# Altium PCB MAIN.PcbDoc
Units mil, origin at the board's own origin, x right, y up, seen from the top; angles counter-clockwise.
Board outline 3254.03 x 2166.03 mil, 2 copper layers (Top Layer, Bottom Layer); 65 components, 48 nets, 232 pads, 40 vias.
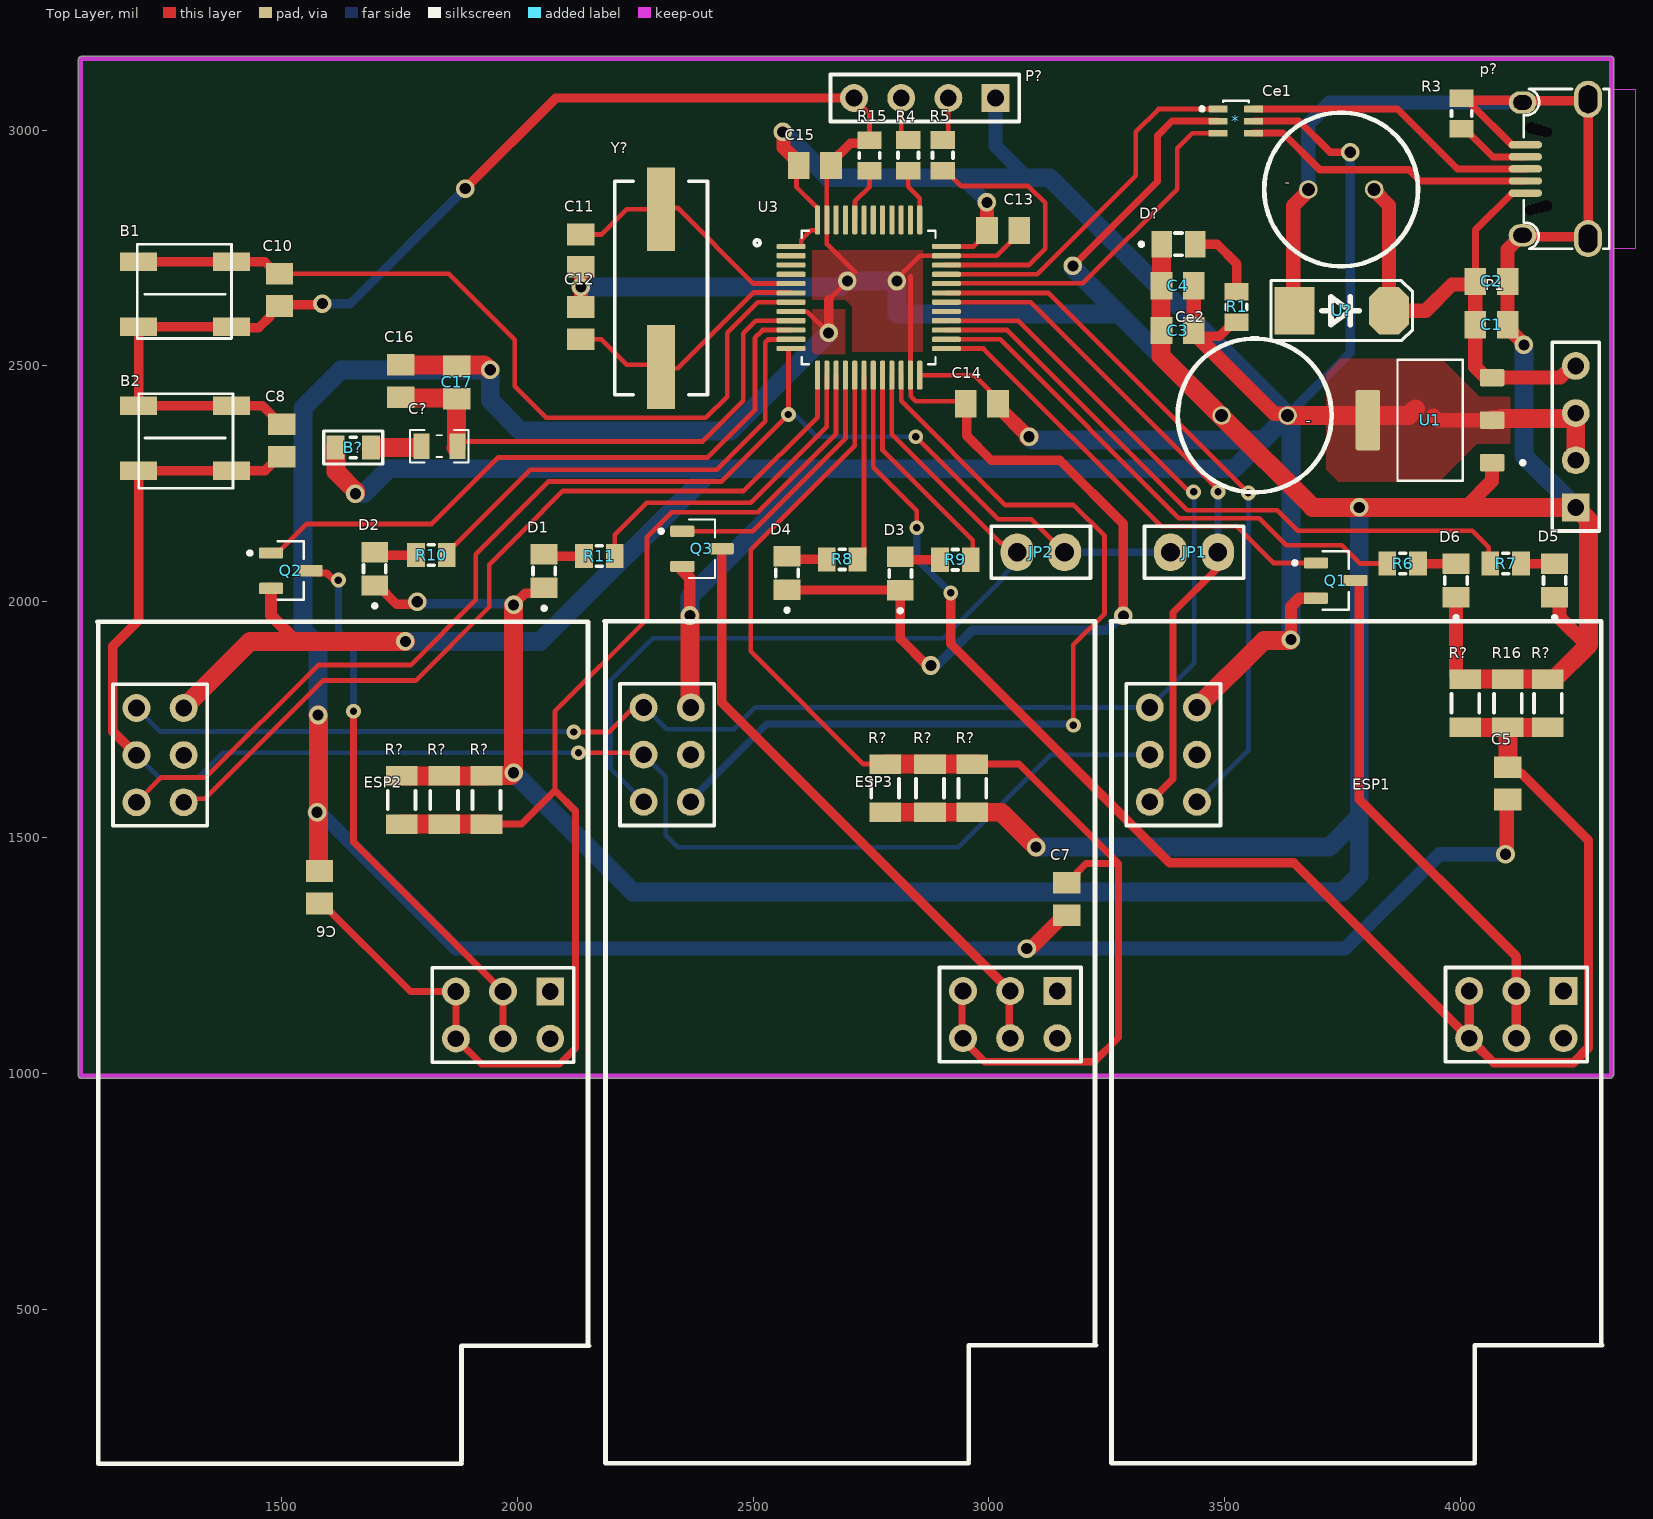
[diagram p0: Top Layer view]
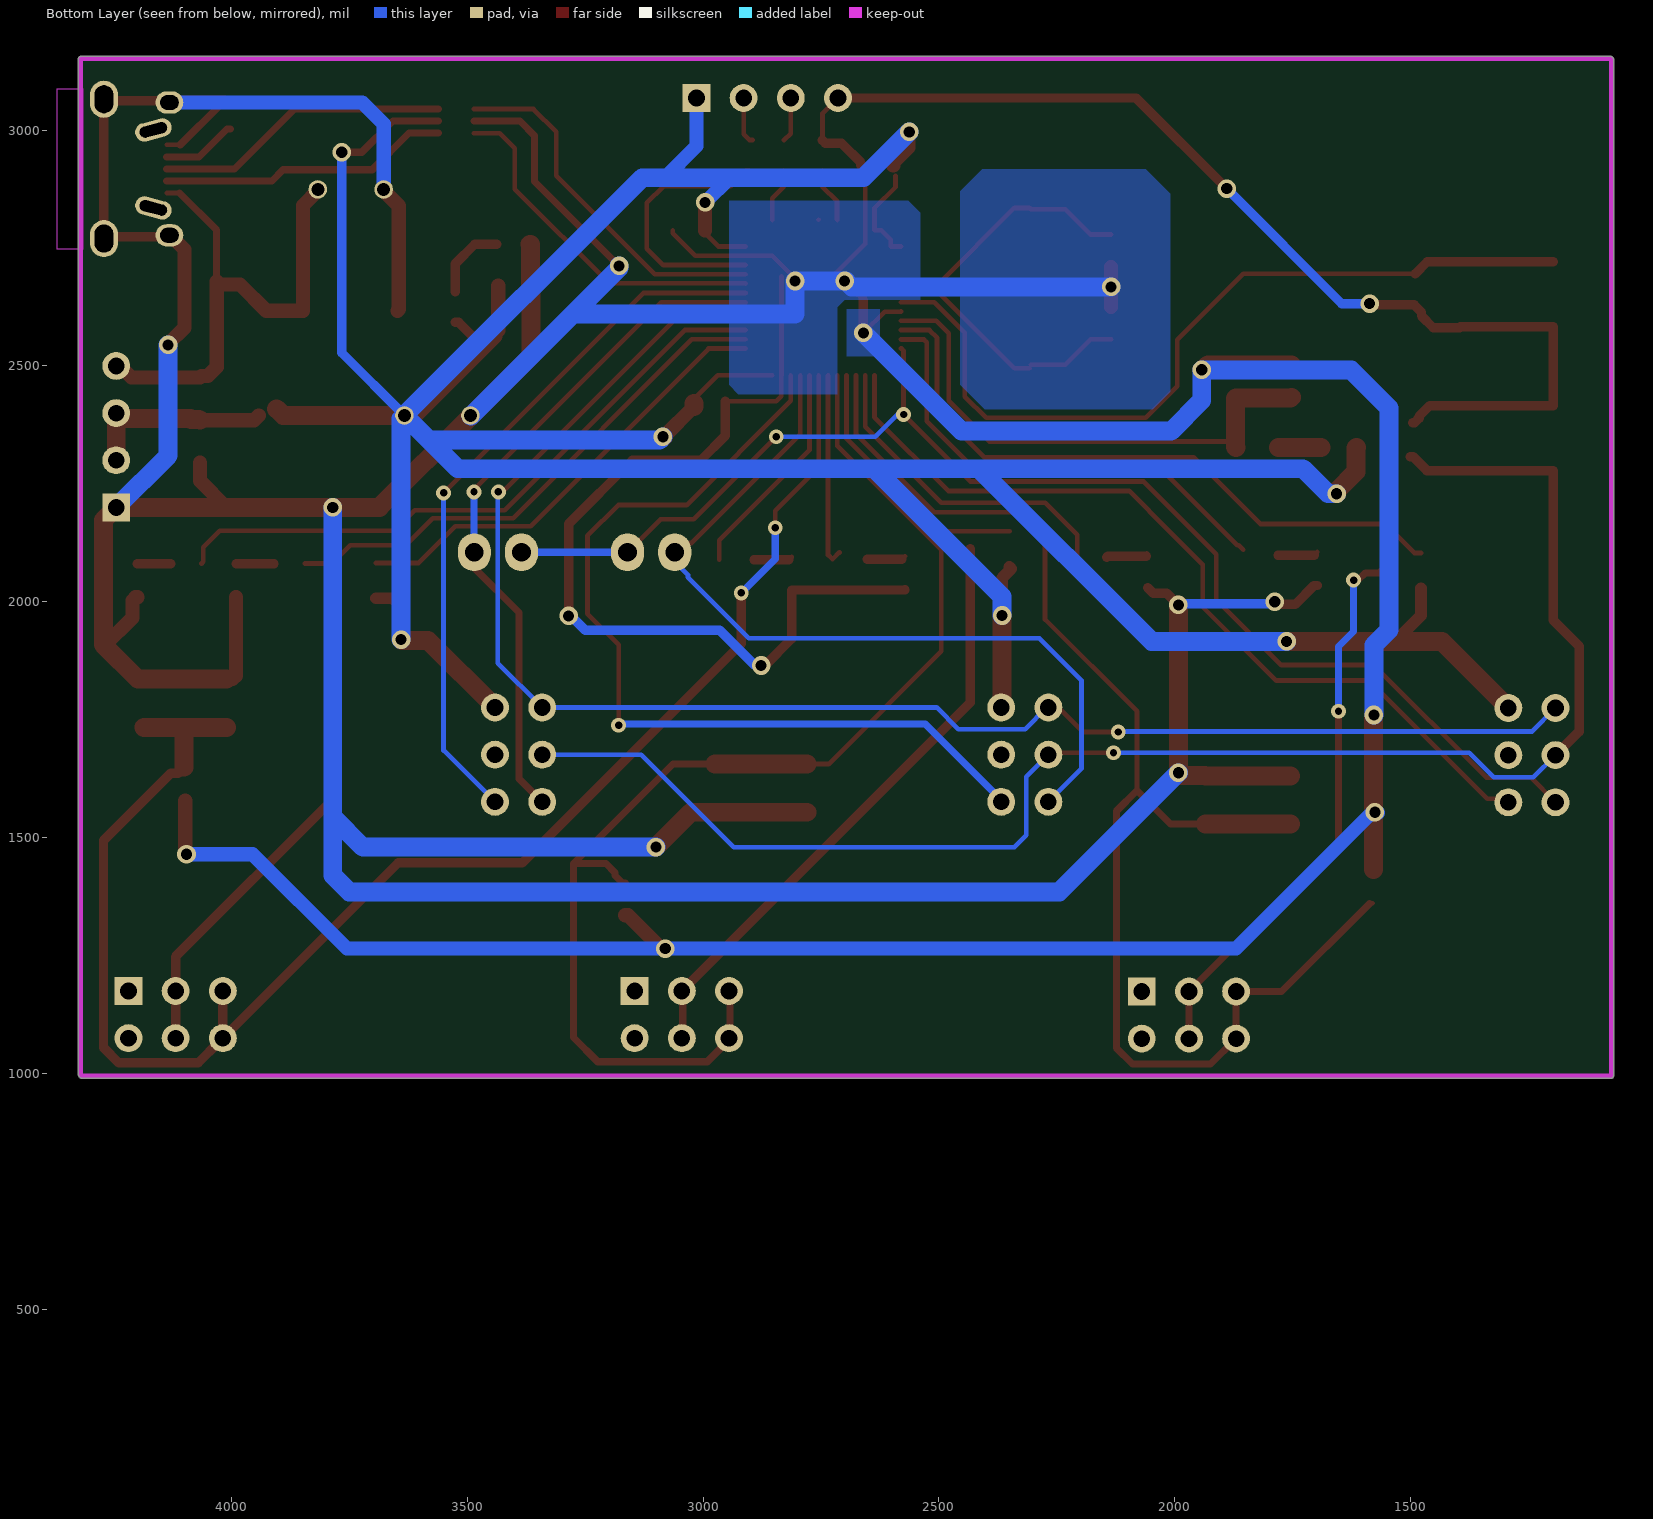
[diagram p1: Bottom Layer view, seen from below]
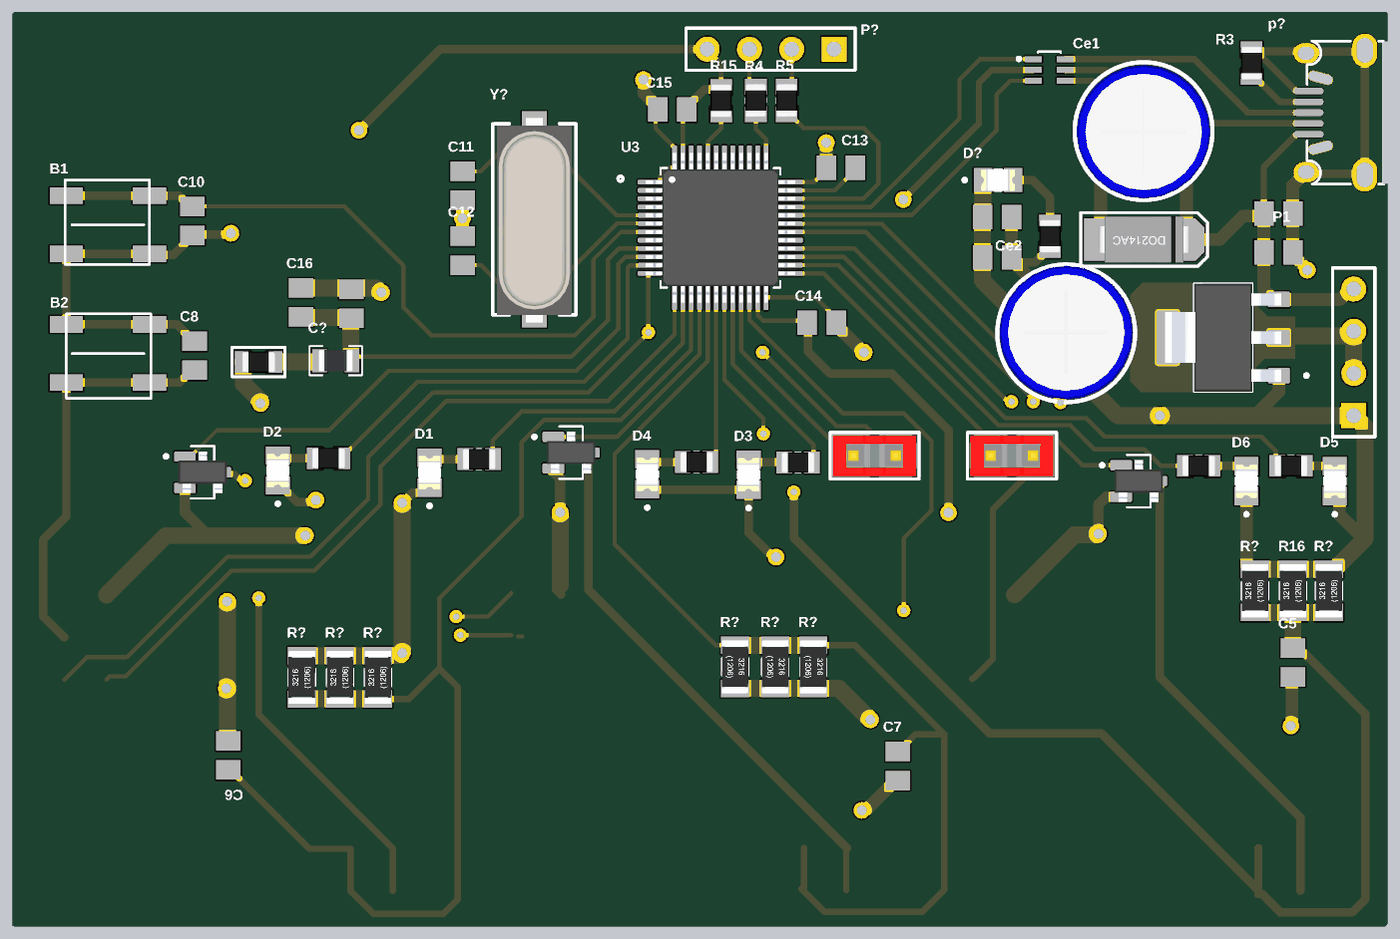
[diagram p2: 3D render of the assembled board from above, using the file's embedded part models]

## Layer stack, top to bottom
Top Solder: solder mask 0.4, Solder Resist, Dk 3.5
Top Layer: signal copper 1.4
Dielectric 1: dielectric 12.6, FR-4, Dk 4.8
Bottom Layer: signal copper 1.4
Bottom Solder: solder mask 0.4, Solder Resist, Dk 3.5

## Board outline
1069.98,995 1069.98,3150 cw(c1075,3150) 1071.47,3153.56 1071.45,3153.55 1072.45,3154.55 1072.44,3154.53 cw(c1076,3151) 1076,3156.01 4319,3156.01 cw(c4319,3151) 4324.02,3151 4324.02,997 cw(c4319,997) 4322.53,993.44 4322.55,993.45 4320.55,991.45 4320.56,991.47 cw(c4317,995) 4317,989.99 1075,989.99 cw(c1075,995)

## Design rules (kind name [scope] priority, off if disabled: settings)
Clearance [All] p1: gap=10 ignorepadtopadclearanceinfootprint=FALSE except(0: Arc-Hole Track-Hole SMDPad-Hole THPad-Hole Via-Hole Fill-Hole Poly-Hole Region-Hole Text-Hole; 7: Arc-Arc Arc-Track Arc-SMDPad Track-Track Track-SMDPad SMDPad-SMDPad)
ComponentClearance [All] p1: gap=10 collisioncheckmode=3 verticalgap=0 showdistances=FALSE
PolygonConnect [All] p1: connectstyle=Direct reliefconductorwidth=10 reliefentries=4 polygonreliefangle="90 Angle" airgapwidth=10
RoutingVias [All] p1: holewidth=28 width=50 viastyle="Through Hole" minholewidth=28 minwidth=50 maxholewidth=28 maxwidth=50
SolderMaskExpansion [All] p1: expansion=4 istentingtop=FALSE
Width [All] p1: maxlimit=40 minlimit=10 preferedwidth=30 minimp=50.000000 maximp=50.000000 favimp=50.000000
29 further rules are at their usual default settings.

## Classes and differential pairs
component class SHEET_MAIN: * B1 B2 B? C1 C2 C3 C4 C5 C6 C7 C8 C10 C11 C12 C13 C14 C15 C16 C17 C? Ce1 Ce2 D1 D2 D3 D4 D5 D6 D? ESP1 ESP2 ESP3 JP1 JP2 P1 P? Q1 Q2 Q3 R1 R3 R4 R5 R6 R8 R9 R10 R11 R15 R16 R? U1 U3 U? Y?

## Components (designator, comment, footprint, x,y, rotation, side; value= is the part's Value field where it differs from the comment)
* "Component_1" PCBComponent_1#1 3433.6,3004 r0 top
B1 "P BUTTON" SMD_PUSH_4PIN 1296,2652 r180 top
B2 "P BUTTON" SMD_PUSH_4PIN 1296,2347 r0 top
B? "BEAD" "RES 0805 (2012X06L)" 1685,2327 r180 top
C1 "100n" CAPC2012X145N 4065.29,2587 r180 top
C2 "10u" CAPC2012X145N 4065.29,2679 r180 top
C3 "10u" CAPC2012X145N 3400,2575 r0 top
C4 "100n" CAPC2012X145N 3400,2670 r0 top
C5 "100n" CAPC2012X145N 4100,1615 r270 top
C6 "100n" CAPC2012X145N 1581,1395 r90 top
C7 "100n" CAPC2012X145N 3165,1370 r270 top
C8 "100n" CAPC2012X145N 1501,2342 r90 top
C10 "100n" CAPC2012X145N 1496,2661.29 r90 top
C11 "22pf" CAPC2012X145N 2135,2744.29 r270 top
C12 "22pf" CAPC2012X145N 2135,2590.71 r90 top
C13 "100n" CAPC2012X145N 3030,2787 r0 top
C14 "100n" CAPC2012X145N 2985,2420 r180 top
C15 "100n" CAPC2012X145N 2631,2925 r0 top
C16 "10n" CAPC2012X145N 1753,2468 r270 top
C17 "100n" CAPC2012X145N 1872,2465 r270 top
C? "1u" IND0805 1835,2330 r180 top
Ce1 "100UF" "MY_CAP_POL 8MM" 3746.86,2874.04 r180 top value=3300u
Ce2 "100UF" "MY_CAP_POL 8MM" 3563.14,2394.96 r0 top value=3300u
D1 "SML-LXT0805IW-TR" LEDC2012X120N 2057,2065 r90 top
D2 "SML-LXT0805IW-TR" LEDC2012X120N 1698,2070 r90 top
D3 "SML-LXT0805IW-TR" LEDC2012X120N 2812,2060 r90 top
D4 "SML-LXT0805IW-TR" LEDC2012X120N 2572,2061 r90 top
D5 "SML-LXT0805IW-TR" LEDC2012X120N 4199,2045 r90 top
D6 "SML-LXT0805IW-TR" LEDC2012X120N 3990,2045 r90 top
D? "SML-LXT0805IW-TR" LEDC2012X120N 3402,2758 r0 top
ESP1 "" PCBComponent_1#2 3630,-2141 r90 top
ESP2 "" PCBComponent_1#2 1482,-2142 r90 top
ESP3 "" PCBComponent_1#2 2557,-2141 r90 top
JP1 "Jumper 2Pin" "Jumper Small - 2.54 - Black" 3435,2105 r0 top
JP2 "Jumper 2Pin" "Jumper Small - 2.54 - Black" 3110,2105 r180 top
P1 "Header 4" HDR1X4 4244,2200 r90 top
P? "Header 4" HDR1X4 3014,3068 r180 top
p? "USB Connector" USB_AB_receptacle 4200.61,2917.64 r270 top
Q1 "FDN360P" SOT95P251X112-3N 3735,2045 r0 top
Q2 "FDN360P" SOT95P251X112-3N 1520,2066 r0 top
Q3 "FDN360P" SOT95P251X112-3N 2391.73,2112.4 r0 top
R1 "Resistor 0.25w" Resistor_SMD_0805 3525,2625 r90 top value=220r
R3 "Resistor 0.25w" Resistor_SMD_0805 4002,3035 r270 top value=100K
R4 "Resistor 0.25w" Resistor_SMD_0805 2829,2946.48 r270 top value=22r
R5 "Resistor 0.25w" Resistor_SMD_0805 2902,2946.48 r270 top value=22r
R6 "Resistor 0.25w" Resistor_SMD_0805 3877,2081 r180 top value=220r
R7 "Resistor 0.25w" Resistor_SMD_0805 4095.48,2081 r180 top value=220r
R8 "Resistor 0.25w" Resistor_SMD_0805 2688.81,2090 r0 top value=220r
R9 "Resistor 0.25w" Resistor_SMD_0805 2928.81,2089 r0 top value=220r
R10 "Resistor 0.25w" Resistor_SMD_0805 1818,2099 r0 top value=220r
R11 "Resistor 0.25w" Resistor_SMD_0805 2174.19,2097 r0 top value=220r
R15 "Resistor 0.25w" Resistor_SMD_0805 2747,2946 r270 top value=10K
R16 "Resistor" "Resistor_SMD_1206 (3216)" 4100,1785 r90 top value=1r
R? "Resistor" "Resistor_SMD_1206 (3216)" 2780,1605 r270 top value=1r
R? "Resistor" "Resistor_SMD_1206 (3216)" 1845,1580 r90 top value=1r
R? "Resistor" "Resistor_SMD_1206 (3216)" 2965,1605 r270 top value=1r
R? "Resistor" "Resistor_SMD_1206 (3216)" 4010,1785 r90 top value=1r
R? "Resistor" "Resistor_SMD_1206 (3216)" 1755,1580 r90 top value=1r
R? "Resistor" "Resistor_SMD_1206 (3216)" 4185,1785 r90 top value=1K
R? "Resistor" "Resistor_SMD_1206 (3216)" 2875,1605 r270 top value=1r
R? "Resistor" "Resistor_SMD_1206 (3216)" 1935,1580 r90 top value=1r
U1 "AMS1117-3.3" SOT229P700X180-4N 3935,2385 r180 top
U3 "STM32F103C8T6" QFP50P900X900X160-48N 2745,2645 r0 top
U? "SMBJ5.0CA" DO-214AC 3648,2617 r0 top
Y? "12 MHz" "Crystal SMD" 2305,2665 r90 top

## Footprints (in the part's own frame and the unit in brackets; to place one, negate y for a bottom-side part, rotate by r counter-clockwise, add the part's x,y. Pads: shape width x height; smd on the part's side, far side on the other; paste and mask are expansions set on the pad)
CAPC2012X145N [mm]
  rect 1.17x1.47 smd: 1(-0.871,0) 2(0.871,0)
"Crystal SMD" [mm] "DESIGNER ABBAS BASEREH"
  rect 4.5x1.5 smd: 1(-4.25,0) 2(4.25,0)
  silkscreen extent -5.75,-2.5 5.75,2.5, body extent -6.21,-2.25 6.09,2.25, height 5.18
DO-214AC [mil] "1N4001-7 SMD DIODE"
  rect 85x100 smd: 1(0,0)
  oct 85x100 smd: 2(200,0)
  silkscreen extent -50,-63 250,64, body extent -8,-55 208,55, height 88
HDR1X4 [mm] "Connector; Header; 4 Position"
  rect 1.5x1.5 hole 0.9: 1(0,0)
  round 1.5 hole 0.9: 2(2.54,0) 3(5.08,0) 4(7.62,0)
  silkscreen extent -1.27,-1.27 8.89,1.27
IND0805 [mm] "Chip Inductor, 2-Leads, Body 2/00x1/25mm, IPC Medium Density DESIGNER:ABBAS BASEREH"
  rect 0.87x1.37 smd: 1(-0.97,0) 2(0.97,0)
  silkscreen extent -1.58,-0.87 1.58,0.87, body extent -1.02,-0.65 1.02,0.65, height 0.5
"Jumper Small - 2.54 - Black" [mil] "Designer Abbas Basereh"
  oval 70x80 hole 40: 1(-50,0) 2(50,0)
  silkscreen extent -105,-55 105,55, body extent -100,-50 100,50, height 337
LEDC2012X120N [mm]
  rect 1.1x1.45 smd: A(0.9,0) C(-0.9,0)
  silkscreen extent -2.1,-0.6 0.2,0.6, body extent -1,-0.65 1,0.65, height 0.9
"MY_CAP_POL 8MM" [mm]
  round 1 hole 0.7: +(-1.775,-0.001) -(1.775,0.001)
  silkscreen extent -4.13,-4.14 4.15,4.14, body extent -4.02,-3.98 4.03,4.08, height 12.03
PCBComponent_1#1 [mm]
  rrect9% 1.02x0.36 smd: 1(1.331,1.031) 2(1.331,0.381) 3(1.331,-0.269) 4(3.241,-0.269) 5(3.241,0.381) 6(3.241,1.031)
  silkscreen extent 0.36,0.94 2.97,1.48
PCBComponent_1#2 [mm]
  rect 1.5x1.5 hole 0.9: 1(84.226,-14.935)
  round 1.5 hole 0.9: 2(81.686,-14.935) 3(84.226,-12.395) 4(81.686,-12.395) 5(84.226,-9.855) 6(81.686,-9.855) 7(99.492,7.341) 8(99.492,4.801) 9(96.952,7.341) 10(96.952,4.801) 11(94.412,7.341) 12(94.412,4.801)
  silkscreen extent 58.8,-17.02 104.14,9.45
QFP50P900X900X160-48N [mm]
  rrect50% 1.56x0.28 smd: 1(-4.18,2.75) 2(-4.18,2.25) 3(-4.18,1.75) 4(-4.18,1.25) 5(-4.18,0.75) 6(-4.18,0.25) 7(-4.18,-0.25) 8(-4.18,-0.75) 9(-4.18,-1.25) 10(-4.18,-1.75) 11(-4.18,-2.25) 12(-4.18,-2.75) 25(4.18,-2.75) 26(4.18,-2.25) 27(4.18,-1.75) 28(4.18,-1.25) 29(4.18,-0.75) 30(4.18,-0.25) 31(4.18,0.25) 32(4.18,0.75) 33(4.18,1.25) 34(4.18,1.75) 35(4.18,2.25) 36(4.18,2.75)
  rrect50% 0.28x1.56 smd: 13(-2.75,-4.18) 14(-2.25,-4.18) 15(-1.75,-4.18) 16(-1.25,-4.18) 17(-0.75,-4.18) 18(-0.25,-4.18) 19(0.25,-4.18) 20(0.75,-4.18) 21(1.25,-4.18) 22(1.75,-4.18) 23(2.25,-4.18) 24(2.75,-4.18) 37(2.75,4.18) 38(2.25,4.18) 39(1.75,4.18) 40(1.25,4.18) 41(0.75,4.18) 42(0.25,4.18) 43(-0.25,4.18) 44(-0.75,4.18) 45(-1.25,4.18) 46(-1.75,4.18) 47(-2.25,4.18) 48(-2.75,4.18)
  silkscreen extent -6.15,-3.6 3.6,3.6, body extent -4.5,-4.5 4.5,4.5, height 1.6
"RES 0805 (2012X06L)" [mm] "Chip Resistor, 2-Leads, Body 2.0x1.3mm, IPC High Density _ (0.100 W)"
  rect 0.95x1.3 smd: 1(-0.127,0) 2(1.778,0)
  silkscreen extent -0.76,-0.89 2.41,0.89, body extent -0.19,-0.63 1.84,0.64, height 0.6
Resistor_SMD_0805 [mm]
  rect 0.95x1.3 smd: 1(-0.825,0) 2(0.825,0)
  silkscreen extent -0.15,-0.55 0.15,0.55, body extent -1.02,-0.63 1.02,0.64, height 0.6
"Resistor_SMD_1206 (3216)" [mm]
  rect 1.05x1.7 smd: 1(-1.298,0) 2(1.298,0)
  silkscreen extent -0.5,-0.75 0.5,0.75, body extent -1.6,-0.8 1.6,0.8, height 0.55
SMD_PUSH_4PIN [mm]
  rect 2x1 smd: 1(-2.5,1.75) 2(-2.5,-1.75) 3(2.5,-1.75) 4(2.5,1.75)
  silkscreen extent -2.5,-2.69 2.58,2.39
SOT95P251X112-3N [mm]
  rrect25% 1.3x0.61 smd: 1(-1.06,0.95) 2(-1.06,-0.95) 3(1.06,0)
  silkscreen extent -2.3,-1.58 0.7,1.58, body extent -1.46,-1.25 1.46,1.25, height 1.12
SOT229P700X180-4N [mm]
  rrect15% 1.31x0.93 smd: 1(-3.345,2.29) 2(-3.345,0) 3(-3.345,-2.29)
  rrect15% 1.31x3.24 smd: 4(3.345,0)
  silkscreen extent -5.1,-3.25 1.75,3.25, body extent -3.5,-3.25 3.5,3.25, height 1.8
USB_AB_receptacle [mm] "USB Micro AB - receptacle  DESIGNER ABBAS BASEREH"
  oval 0.4x1.8 smd mask+0.05: 1(1.3,-1.612) 2(0.65,-1.612) 3(0,-1.612) 4(-0.65,-1.612) 5(-1.3,-1.612)
  oval 2x1.5 hole 1 slot 1.5 at 0 deg mask+0.05: 6(-3.75,1.763) 6(3.75,1.763)
  oval 1.2x1.5 hole 0.8 slot 1 at 90 deg mask+0.05: 6(-3.575,-1.762) 6(3.575,-1.762)
  oval 1.5x0.6 / inner oval 1.5x0.6 / far side oval 2x1 hole 0.6 slot 1.5 at 75 deg rot 75 mask+0.05: H(-2.1,-0.9)
  oval 1.5x0.6 / inner oval 1.5x0.6 / far side oval 2x1 hole 0.6 slot 1.5 at 105 deg rot 105 mask+0.05: H(2.1,-0.9)
  Keep-Out Layer board cut-out: -4.3,2.888 -4.3,4.3 4.3,4.3 4.3,2.888
  silkscreen extent -4.31,-1.7 4.3,2.9, body extent -4.32,-1.51 4.33,4.39, height 2.8

## Part data
B1 B2: library part "PUSH BUTTON_SMD-4PIN"
B?: library part "FERIT BEAD", "FERIT BEAD SMD 1206"
C1 C2 C3 C4 C5 C6 C7 C8 C10 C11 C12 C13 C14 C15 C16 C17: library part VJ0805D820GXCAP, Package=None, Availability=Unavailable, MP=VJ0805D820GXCAP, Price=None
C?: library part "INDUCTOR SMD PACKAGE", "TOTAL INDUCTOR SMD PACK", Data=2017-3-10, Desc.="INDUCTOR  SMD TOTAL PACKAGES", Designer="Abbas Basereh"
Ce1 Ce2: library part "Cap Pol_8mm", "CAP-3300Uf"
D1 D2 D3 D4 D5 D6 D?: "Red - LED Indication - Discrete 2V 0805 (2012 Metric)", Package="0805 Lumex", Availability="In Stock", Check_prices=https://www.snapeda.com/parts/SML-LXT0805IW-TR/Lumex+Opto%252FComponents+Inc./view-part/?ref=eda, MF="Lumex Opto/Components", MP=SML-LXT0805IW-TR, Price=None, Purchase-URL=https://pricing.snapeda.com/search/part/SML-LXT0805IW-TR/?ref=eda, SnapEDA_Link=https://www.snapeda.com/parts/SML-LXT0805IW-TR/Lumex+Opto%252FComponents+Inc./view-part/?ref=snap
ESP1 ESP2 ESP3: library part Component_1
JP1 JP2: "Jumper, 2-Pin", Data=16-12-2016, Designer="Abbas Basereh"
P1 P?: "Header, 4-Pin", LatestRevisionDate=17-Jul-2002, LatestRevisionNote="Re-released for DXP Platform.", Publisher="Altium Limited"
p?: library part "USB AB MICRO CONNECTOR", "USB MICRO-B Type Connector", Max Current=1600mA, Category=Connector, ComponentLink1Description=Datasheet, ComponentLink2Description=Reference, Designer="ABBAS BASEREH", Mounting Technology="Surface Mount\Through-Hole", Pin Count=5-7, Publisher="ABBAS BASEREH", Status=Unreleased, Update=1395-11-17
Q1 Q2 Q3: "P-Channel 30V 2A (Ta) 500mW (Ta) Surface Mount SuperSOT-3", Package="TO-236-3 ON", Availability="In Stock", Check_prices=https://www.snapeda.com/parts/FDN360P/Onsemi/view-part/?ref=eda, MF=ON, MP=FDN360P, Price=None, Purchase-URL=https://pricing.snapeda.com/search/part/FDN360P/?ref=eda, SnapEDA_Link=https://www.snapeda.com/parts/FDN360P/Onsemi/view-part/?ref=snap
R1 R3 R4 R5 R6 R7 R8 R9 R10 R11 R15: library part Resistor, LatestRevisionDate=17-Jul-2002, LatestRevisionNote="Re-released for DXP Platform.", Publisher="Altium Limited"
U1: "Sot223/Pkg 1-Amp 3.3-Volt Low Drop Out Voltage Regulatator", Package="SOT-223 Seeed Technology", Availability="Not in stock", Check_prices=https://www.snapeda.com/parts/AMS1117-3.3/Advanced+Monolithic+Systems/view-part/?ref=eda, MF="Advanced Monolithic Systems", MP=AMS1117-3.3, Price=None, SnapEDA_Link=https://www.snapeda.com/parts/AMS1117-3.3/Advanced+Monolithic+Systems/view-part/?ref=snap
U3: "ARMÂ® CortexÂ®-M3 STM32F1 Microcontroller IC 32-Bit 72MHz 64KB (64K x 8) FLASH 48-LQFP (7x7)", Package="LQFP-48 STMicroelectronics", Availability="In Stock", Check_prices=https://www.snapeda.com/parts/STM32F103C8T6/STMicroelectronics/view-part/?ref=eda, MF=STMicroelectronics, MP=STM32F103C8T6, Price=None, Purchase-URL=https://pricing.snapeda.com/search/part/STM32F103C8T6/?ref=eda, SnapEDA_Link=https://www.snapeda.com/parts/STM32F103C8T6/STMicroelectronics/view-part/?ref=snap
U?: "TVS Diode for 5v", Link=javanElectronic, Price="2625 Rial"
Y?: library part XTAL_Crystal, "XTAL Crystal", ComponentLink1Description=Datasheet, ComponentLink2Description=Reference, Design Date=2017-1-3, Designer="ABBAS BASEREH", Mounting Technology="Surface Mount\Through-Hole", Status=Unreleased
R16 R? R? R? R? R? R? R? R?: Email=razi.vesali@gmail.com, LatestRevisionNote="Re-released for puplic", Published=17-Jun-2016, Publisher="Seyed Razi Vesali"

## Via types
v1: diameter 39.37, hole 23.62, Top Layer to Bottom Layer, 28 vias
v2: diameter 31.5, hole 15.75, Top Layer to Bottom Layer, 12 vias

## Nets (pads, with @x,y where several pads share a name; then routed paths per layer and width w, separated by ;. In a path a pad name is that pad's centre, name@x,y a point inside that pad or via, vN(x,y) a via of type N, cw(c..) or ccw(c..) an arc to the next point about the centre after c; other vN are vias at no path point)
ADC1: C5.1 ESP1.5 ESP1.6 R16.1 R?.1@4010,1733.9 R?.1@4185,1733.9 U3.19 | length 3409.2
  Top Layer w10: U3.19 2754.84,2285.16 2847,2193 v2(2847,2157)
  Top Layer w20: v2(2919,2019) 2919,1911 3383,1447 3646,1447 ESP1.6 ; ESP1.5 ESP1.6 ; C5.1 4113.03,1636.26 4128.74,1636.26 4271,1494 4271,1055 4239,1023 4070,1023 4026,1067 4018,1067 ESP1.6
  Top Layer w40: R?.1@4010,1733.9 R16.1 ; C5.1 R16.1 ; R?.1@4185,1733.9 4184.92,1733.98 4184.84,1733.9 R16.1
  Bottom Layer w15: v2(2847,2157) 2847,2091 v2(2919,2019)
ADC2: C6.1 ESP2.5 ESP2.6 R?.1@1755,1528.9 R?.1@1845,1528.9 R?.1@1935,1528.9 U3.15 | length 2910.6
  Top Layer w10: C6.1 C6.1@1586.91,1360.71 ; ESP2.6 1870,1072 ESP2.6@1872,1072 ; 2080,1600 2080,1767.5 2275,1962.5 2275,2136.96 2328.04,2190 2510,2190 2675.59,2355.59 2675.59,2479.92 U3.15
  Top Layer w15: C6.1@1586.91,1360.71 1773.61,1174 ESP2.5 ESP2.6 ; ESP2.6@1872,1072 1924,1020 2090,1020 2124,1054 2124,1556 2080,1600 2008.9,1528.9 R?.1@1935,1528.9
  Top Layer w40: R?.1@1755,1528.9 1845,1528.9 R?.1@1935,1528.9
ADC3: C7.1 ESP3.5 ESP3.6 R?.1@2780,1656.1 R?.1@2875,1656.1 R?.1@2965,1656.1 U3.17 | length 2619.5
  Top Layer w10: U3.17 2715.47,2330.47 2495,2110 2495,1895 2733.9,1656.1 R?.1@2780,1656.1
  Top Layer w15: ESP3.6@2937,1079 2991,1025 3223.21,1025 3275,1076.79 3275,1445 ; ESP3.6@2943,1080 ESP3.5@2943,1176 ; R?.1@2975,1656.1 3063.9,1656.1 3275,1445 ; C7.1 3170.91,1404.29 3186.44,1419.82 3186.44,1425.73 3205.71,1445 3275,1445
  Top Layer w40: R?.1@2780,1656.1 2875,1656.1 2965,1656.1 R?.1@2975,1656.1
BOOT: R15.2 U3.44 | length 123.4
  Top Layer w10: U3.44 2715.98,2810.08 2715.98,2848.8 2747,2879.82 2747,2908.99 R15.2 R15.2@2742.47,2908.99
CTRL1: Q1.1 U3.25 | length 971.9
  Top Layer w10: U3.25 2988.27,2536.73 3365,2160 3525,2160 3602.6,2082.4 Q1.1
CTRL2: Q2.1 U3.10 | length 1388.2
  Top Layer w10: Q2.1 1491.85,2103.4 1553.45,2165 1819,2165 1960,2306 2404,2306 2504,2406 2504,2560 2520.1,2576.1 U3.10
CTRL3: Q3.1 U3.16 | length 561.6
  Top Layer w10: Q3.1 2499.8,2149.8 2695.79,2345.79 U3.16
D+: *.6 p?.3 | length 628.5
  Top Layer w15: *.6 3866.41,3044.59 3993.36,2917.64 p?.3
D-: *.4 p?.2 | length 617.9
  Top Layer w15: *.4 3623.59,2993.41 3701.19,2915.81 3890.19,2915.81 3913.95,2892.05 p?.2
ESP1: ESP1.3 ESP1.4 Q1.3 | length 1112.1
  Top Layer w10: Q1.3 3777.99,2045 Q1.3@3785,2037.99
  Top Layer w20: Q1.3@3785,2037.99 3785,1581 4118,1248 ESP1.3 ESP1.4
ESP2: ESP2.3 ESP2.4 Q2.3 | length 1184.1
  Top Layer w15: Q2.3 1566.24,2061.49 1596.04,2061.49 1611.53,2046 v2(1621,2046) ; v2(1653,1768) 1653,1491 ESP2.3 ESP2.4
  Bottom Layer w15: v2(1621,2046) 1621,1937 1653,1905 v2(1653,1768)
ESP3: ESP3.3 ESP3.4 Q3.3 | length 1290.7
  Top Layer w15: ESP3.4@3043,1076 ESP3.3@3043,1176
  Top Layer w20: Q3.3 2433.46,1786.54 ESP3.3
GND: *.2 B1.1 B1.4 B2.1 B2.4 C1.1 C2.1 C3.1 C4.1 C5.2 C6.2 C7.2 C8.2 C10.1 C11.2 C12.2 C13.2 C14.2 C15.2 C16.1 C17.1 Ce1.- Ce2.+ D1.C D2.C D3.C D4.C D5.C D6.C D?.C P1.1 P?.4 p?.5 p?.6 R3.1 R15.1 R16.2 R?.2 U1.1 U3.8 U3.23 U3.35 U3.47 U?.1 | length 22271.1
  Top Layer w10: U3.8 2580.94,2614.96 2615.04,2614.96 v1(2660,2570) ; C15.2@2656,2925 2656,2888.48 2656.42,2888.06 U3.47 2656.42,2758.58 2716.3,2698.7 ; 2660,2640 v1(2700,2680) ; P?.4 2747,3035 R15.1 ; v1(2805,2680) 2805,2685 2853.58,2733.58 U3.35 3016.78,2733.58 3064.29,2781.09 C13.2 ; 2833.58,2689.49 U3.23 2834.09,2479.92 2834.09,2435.91 2845,2425 C14.2@2952.52,2425 ; R3.1 4009.52,3067.48 4014.07,3062.93 4018.33,3058.67 4018.33,3058.04 4022.59,3053.78 R3.1@4023.22,3053.78 ; p?.5@4108.18,2968.82 p?.5
  Top Layer w15: v1(3178,2712) 3357,2891 3357,2988 3388,3019 *.2 ; R3.1@4023.22,3053.78 p?.5@4108.18,2968.82
  Top Layer w20: C8.2@1496,2379.48 1491.91,2379.48 1482.06,2389.32 1482.06,2393.42 1459.48,2416 1394.53,2416 B2.4 1394.32,2416 1197.68,2416 B2.1 B1.4 B1.1 1396.5,2581.03 1452.08,2581.03 1477.06,2606.02 1477.06,2613.97 1492.78,2629.69 1492.97,2629.5 1584.5,2629.5 v1(1587,2632) v1@1584,2635 ; D2.C 1704.89,2034.57 1744.84,1994.62 1782.62,1994.62 v1(1788,2000) ; v1(1890,2876) 2082,3068 P?.4 ; v1(1992.39,1993.56) 2016.75,2017.91 2045.35,2017.91 D1.C ; D4.C 2572.5,2025.07 2811.5,2025.07 D3.C 2812,1922 2869,1865 v1(2877,1865) ; v1(2660,2570) 2660,2640 ; C15.2 2665.29,2930.91 2706.61,2972.22 2740.74,2972.22 R15.1 ; C14.2@2952.52,2425 2952.52,2352.48 3005,2300 3150,2300 3285,2165 v1(3285,1970) ; R3.1@4014.07,3062.93 4126.67,3062.93 4131.22,3058.39 4134.67,3061.83 4266.56,3061.83 4270,3065.28 4270,2776.89 4266.56,2773.44 4134.67,2773.44 p?.6@4131.22,2776.89 ; v1(4095,1465) v1@4097.5,1467.5 ; C5.2@4097.5,1578.21 C5.2
  Top Layer w30: C12.2 v1(2135,2667.5) C11.2 ; v1(3080,1265) 3081.79,1266.79 3090.18,1266.79 3159.09,1335.71 C7.2 ; U?.1 3645,2620 3645,2839.46 3677,2871.46 Ce1.- ; D6.C 3990,1843.31 3997.2,1836.1 R?.2@4010,1836.1 ; 4010,2200 4066.69,2256.69 U1.1 ; v1@4097.5,1467.5 C5.2@4097.5,1578.21 ; p?.6@4131.22,2776.89 4129.98,2776.89 4099.58,2746.49 C2.1 C1.1 4099.58,2581.09 4134.09,2546.59 v1(4134.09,2544.69) ; D5.C 4202.98,2009.57 4209.63,2002.91 4209.63,1966.37 4268.85,1907.15
  Top Layer w40: v1(1578,1760) 1579,1759 C6.2@1579,1432.32 ; C16.1 1930,2502.29 1940.29,2492 v1(1943,2492) ; R?.2@1755,1631.1 1845,1631.1 1935,1631.1 1935.67,1631.77 1986.55,1631.77 v1(1992.39,1637.61) v1(1992.39,1993.56) ; R?.2@2780,1553.9 2875,1553.9 2965,1553.9 3026.1,1553.9 v1(3100,1480) ; C4.1@3365.02,2667.5 3365.02,2575 3365.02,2520.95 3492.16,2393.8 3685.97,2200 v1(3785,2200) 4010,2200 P1.1 4271,2173 4271,1924.87 4271,1909.31 4197.8,1836.1 4185,1836.1 R16.2 R?.2@4010,1836.1 ; C4.1 3366.14,2670.43 3366.14,2757.57 D?.C
  Bottom Layer w20: v1(1587,2632) 1646,2632 v1(1890,2876) ; v1(1788,2000) 1792,1996 1989.95,1996 v1(1992.39,1993.56) ; v1@2892,1867 2965,1940 3250,1940 3280,1970 v1(3285,1970)
  Bottom Layer w30: v1@1569,1553 1575,1553 v1(1576,1554) 1578,1552 1583,1552 1870,1265 v1(3080,1265) 3755,1265 3955,1465 v1(4095,1465) ; Ce1.- 3677,3013 3722.39,3058.39 p?.6@4131.22,3058.39
  Bottom Layer w40: v1(1578,1760) 1578,1908 1546,1940 1546,2411 1626,2491 1942,2491 v1(1943,2492) 1943,2427 2008,2362 2452,2362 v1(2660,2570) ; v1(1992.39,1637.61) 2245,1385 3750,1385 3785,1420 3785,1544 ; v1(2135,2667.5) 2684.79,2667.5 2697.29,2680 v1(2700,2680) v1(2805,2680) 2805,2610 3275,2610 ; v1(3100,1480) 3721,1480 3785,1544 ; v1(3178,2712) 3178,2707.96 Ce2.+@3492.16,2393.8 ; v1(3785,2200) 3785,1544 ; v1(4134.09,2544.69) 4134.09,2309.91 P1.1
iO9: ESP1.7 ESP2.7 ESP3.7 U3.28 | length 3392.5
  Top Layer w10: v2(2120,1723.97) 2193.97,1723.97 ESP3.7@2250,1780 ; U3.28 3062.21,2595.79 3425,2233 v2(3434,2233)
  Bottom Layer w10: ESP2.7 1243,1725 2118.97,1725 v2(2120,1723.97) 2120,1725.94 v2@2125,1730.94 ; ESP3.7 2271,1776 2317,1730 2459,1730 2505,1776 ESP1.7 3435,1870 3435,2232 v2(3434,2233)
LED1: R11.2 U3.14 | length 698.6
  Top Layer w10: R11.2 2206.67,2141.67 2275,2210 2495,2210 2656.42,2371.42 U3.14
LED2: R10.2 U3.11 | length 1008.3
  Top Layer w10: R10.2@1854.81,2110.22 1864.18,2119.59 1867.13,2119.59 2027.54,2280 2423,2280 2526,2383 2526,2550.05 2531.86,2555.91 2579.92,2555.91 U3.11
LED3: R9.2 U3.20 | length 470.6
  Top Layer w10: U3.20 2774.53,2321.47 2965.62,2130.38 R9.2@2965.62,2089
LED4: R8.2 U3.18 | length 415.2
  Top Layer w10: R8.2@2710.94,2104.69 2725.62,2090 2735,2099.38 2735,2480.28 U3.18
LED5: R7.2 U3.27 | length 1376.7
  Top Layer w10: U3.27 3038.41,2576.1 3420.26,2194.25 3610.75,2194.25 3654.48,2150.52 4024.48,2150.52 4059.27,2115.73 4059.27,2084.73 R7.2
LED6: R6.2 U3.26 | length 1131.9
  Top Layer w10: U3.26 3023.58,2556.42 3402.75,2177.25 3572.75,2177.25 3630,2120 3748,2120 3787,2081 R6.2
NetB?_1: B?.1 C?.2 | length 90
  Top Layer w40: B?.1 C?.2@1780,2327
NetC11_1: C11.1 U3.5 Y?.2 | length 535.3
  Top Layer w10: C11.1 2178.58,2778.58 2232.32,2832.32 Y?.2 2307.68,2835 2340,2835 2500.47,2674.53 U3.5
NetC12_1: C12.1 U3.6 Y?.1 | length 531.5
  Top Layer w10: C12.1 2178.58,2556.42 2232.32,2502.68 Y?.1@2305,2502.68 ; Y?.1@2307.68,2495 2340,2495 2500.47,2655.47 U3.6@2580.43,2655.47
NetC16_2: C16.2 C17.2 C?.1 U3.9 | length 1125.9
  Top Layer w10: C?.1 1883.19,2340 2393,2340 2479,2426 2479,2569 2505.79,2595.79 U3.9
  Top Layer w20: C17.2@1870.5,2432.21 C17.2
  Top Layer w40: C16.2 1754.5,2432.21 C17.2@1870.5,2432.21 ; C?.1@1870,2327 1871,2328 1871,2429.71 C17.2
NetD1_A: D1.A R11.1 | length 92.6
  Top Layer w10: D1.A@2059.28,2102.72 D1.A D1.A@2060.43,2097 ; R11.1@2137.38,2097 R11.1
  Top Layer w20: D1.A@2060.43,2097 R11.1@2137.38,2097 ; R11.1 R11.1@2143.99,2094.72
NetD2_A: D2.A R10.1 | length 85.9
  Top Layer w10: D2.A D2.A@1704.43,2099
  Top Layer w20: D2.A@1704.43,2099 R10.1@1781.19,2099
NetD3_A: D3.A R9.1 | length 84.1
  Top Layer w10: D3.A@2812,2093.46 D3.A@2812.98,2092.48 ; D3.A D3.A@2818.43,2089
  Top Layer w20: D3.A@2818.43,2089 R9.1@2892,2089
NetD4_A: D4.A R8.1 | length 82.7
  Top Layer w10: D4.A D4.A@2578.43,2090
  Top Layer w20: D4.A@2578.43,2090 R8.1@2652,2090
NetD5_A: D5.A R7.1 | length 71
  Top Layer w20: R7.1@4127.96,2080.87 D5.A@4199,2080.87
NetD6_A: D6.A R6.1 | length 80.8
  Top Layer w10: D6.A@3989.43,2081 D6.A
  Top Layer w20: R6.1 D6.A@3989.43,2081
NetD?_A: D?.A R1.2 | length 164.1
  Top Layer w20: D?.A 3484,2758 3525,2717 R1.2
NetP?_2: P?.2 R5.1 | length 100.9
  Top Layer w10: R5.1@2895.11,2978.96 R5.1 2914,2990.96 P?.2
NetP?_3: P?.3 R4.1 | length 109.3
  Top Layer w10: P?.3@2823.39,3058.61 P?.3 2814,2992.66 2827.7,2978.96 R4.1
Netp?_4: p?.4 R3.2 | length 159.7
  Top Layer w15: R3.2 4008.89,3002.52 4068.18,2943.23 p?.4
NRST: B1.2 B1.3 C10.2 U3.7 | length 1758
  Top Layer w10: C10.2@1490.09,2695.58 C10.2 1854.42,2695.58 1995,2555 1995,2457 2062,2390 2400,2390 2445,2435 2445,2570.16 2510,2635.16 U3.7
  Top Layer w20: B1.3 B1.2 1464.78,2720.9 C10.2@1490.09,2695.58
RESET_ESP: B2.2 B2.3 C8.1 ESP1.9 ESP2.9 ESP3.9 | length 3378.1
  Top Layer w10: v2(2130,1680) ESP3.9@2250,1680 ; ESP3.9@2266,1677 ESP3.9@2276,1677
  Top Layer w20: ESP2.9 1143,1725 1143,1906 1197.57,1960.57 B2.2 B2.3 1465.49,2278.1 1495.09,2307.71 C8.1
  Bottom Layer w10: ESP2.9 1240,1628 1324,1628 1376,1680 v2(2130,1680) ; ESP3.9 2315,1629 2315,1505 2340,1480 2935,1480 3131,1676 ESP1.9
SW-CLK: R4.2 U3.37 | length 114.5
  Top Layer w10: R4.2 2829,2879.67 2853.27,2855.4 U3.37
SW-DIO: R5.2 U3.34 | length 566.3
  Top Layer w10: R5.2 2908.89,2914 2941.5,2881.39 3083.61,2881.39 3119.1,2845.9 3119.1,2748.9 3084.1,2713.9 U3.34
USART1-RX: ESP1.12 U3.31 | length 1516.1
  Top Layer w10: U3.31 2909.88,2654.53 3126.47,2654.53 v2(3550,2231)
  Bottom Layer w10: ESP1.12 3550,1685 v2(3550,2231)
USART1-TX: ESP1.11 JP1.2 U3.30 | length 1430
  Top Layer w10: U3.30 3088.33,2635.16 3485,2238.48 3485,2233.52 v2(3485.63,2232.89)
  Top Layer w15: ESP1.11 3341,1577 3342,1577 3390,1625 3390,1977 JP1.2@3485,2072
  Bottom Layer w10: JP1.2 JP1.2@3485,2110
  Bottom Layer w15: JP1.2@3485,2110 3485.31,2110.31 3485.31,2232.58 v2(3485.63,2232.89)
USART2-RX: ESP2.12 U3.13 | length 1823.5
  Top Layer w10: ESP2.12 1300.53,1582.53 1337.53,1582.53 1588,1833 1785,1833 1941,1989 1941,2079 2012,2150 2097,2235 2480,2235 2636.73,2391.73 U3.13
USART2-TX: ESP2.11 JP1.1 JP2.1 U3.12 | length 2857.8
  Top Layer w10: ESP2.11 1245.69,1627.69 1339.69,1627.69 1578,1866 1774,1866 1912,2004 1912,2101 2066,2255 2433,2255 v2(2575,2397) 2575,2532.22 2579.51,2536.73 U3.12 ; v2(2845,2350) 3020,2175 3090,2175 JP2.1
  Bottom Layer w10: v2(2575,2397) 2588,2397 2635,2350 v2(2845,2350) ; JP2.1 JP2.1@3160,2110
  Bottom Layer w15: JP2.1 JP1.1
USART3-RX: ESP3.12 U3.22 | length 1915.9
  Top Layer w10: U3.22 2813.9,2426.1 3035,2205 3180,2205 3245,2140 3245,1975 3179,1909 v2(3179,1738.25)
  Bottom Layer w15: ESP3.12 2368,1580 2529,1741 3176.25,1741 v2(3179,1738.25)
USART3-TX: ESP3.11 JP2.2 U3.21 | length 1779.7
  Top Layer w10: U3.21 2794.21,2354.79 3024.14,2124.86 3028.91,2124.86 3048.76,2105 JP2.2
  Bottom Layer w10: ESP3.11@2260.08,1582.92 ESP3.11@2266,1577 ; ESP3.11 2268,1577 2267,1577 2198,1646 2198,1834 2287,1923 2903,1923 3032,2052 3032,2057.29 3060,2085.29 JP2.2
USB-DM: *.3 U3.32 | length 758.9
  Top Layer w10: U3.32 2910.04,2675 3199,2675 3399,2875 3399,2961 3431,2993 3485.59,2993 *.3
USB-DP: *.1 U3.33 | length 776
  Top Layer w10: U3.33 3102.21,2694.21 3311,2903 3311,2996 3359.59,3044.59 *.1
vdd-3.3v: *.5 B?.2 C3.2 C4.2 C13.1 C14.1 C15.1 Ce2.- ESP1.8 ESP2.8 ESP3.8 P1.2 P1.3 P?.1 Q1.2 Q2.2 Q3.2 R1.1 U1.2 U1.4 U3.1 U3.24 U3.36 U3.48 | length 10037
  Top Layer w10: U3.1 2601.75,2753.27 2602.26,2753.78 2602.26,2767.26 2622.74,2787.74 2636.22,2787.74 2636.73,2788.25 2636.73,2834.76 2636.22,2835.28 2635.72,2835.28 2592.08,2878.92 2592.08,2883.1 2592,2883.18 C15.1@2592,2903.09 ; U3.24 2968.94,2480.43 C14.1@3017.48,2431.89 ; U3.36 2967.88,2753.27 C13.1@2997.52,2782.91
  Top Layer w15: *.5 3657.41,3019 3723.41,2953 v1(3766,2953)
  Top Layer w20: ESP3.8@2366,1798 2356,1788 ESP3.8 ; C3.2 3434.29,2569.09 3440.39,2563 3488.59,2563 3518.11,2592.52 R1.1 ; Ce2.-@3629.29,2398.71 Ce2.-
  Top Layer w25: Q2.2 1478.27,1970.73 1533,1916 ; Q3.2@2351,2074 2347,2070 2366,2051 v1(2366,1971) ; v1@3637.81,1917.81 v1(3640,1920) 3640,1990.02 3657.57,2007.6 Q1.2
  Top Layer w30: v1(2563,2996) 2564.79,2994.21 2564.79,2962.82 2596.71,2930.91 C15.1 ; C13.1 v1(2995.71,2846.71) ; C14.1@3019.29,2414.09 v1@3083.39,2350 ; C4.2 C3.2 C3.2@3436.57,2572.72 ; C3.2@3440.39,2563 3604.68,2398.71 Ce2.-@3629.29,2398.71 ; 3942,2395 3952,2385 U1.2
  Top Layer w40: ESP2.8 1434,1916 1533,1916 v1(1763,1916) ; B?.2 1616.3,2325.7 1616.3,2275.58 1657,2234.88 v1(1657,2229) ; ESP3.8@2366,1798 v1(2366,1971) ; C14.1@3019.29,2414.09 C14.1 ; v1@3083.39,2350 v1(3085,2350) ; ESP1.8 3582.81,1917.81 v1@3637.81,1917.81 ; Ce2.- 3890,2395 3904,2409 ; U1.2 4068.39,2386.69 4084.98,2386.69 4086.98,2388.69 P1.3@4220.1,2388.69 ; P1.2 P1.3
  Bottom Layer w20: Ce2.- 3766,2528 v1(3766,2953)
  Bottom Layer w30: 2943.42,2899 v1(2995.71,2846.71) ; P?.1 3014,2966 3081,2899
  Bottom Layer w40: v1(1657,2229) 1675,2229 1728,2282 2427,2282 2636,2282 ; v1(1763,1916) 2049,1916 2413,2280 ; v1(2366,1971) 2366,2011 2636,2281 2636,2282 ; v1(2563,2996) 2660,2899 2943.42,2899 3081,2899 3129,2899 Ce2.- ; v1(3085,2350) 3092.1,2342.9 3580.9,2342.9 ; v1(3640,1920) 3640,2388 Ce2.- ; 2636,2282 3520,2282 3580.9,2342.9 ; 3580.9,2342.9 Ce2.-
VDD-5v: C1.2 C2.2 Ce1.+ P1.4 p?.1 U1.3 U?.2 | length 1134.4
  Top Layer w10: p?.1@4109.57,2866.46 p?.1
  Top Layer w15: C2.2 4031,2787.89 p?.1@4109.57,2866.46
  Top Layer w30: Ce1.+ 3816.72,2871.55 3848,2840.27 U?.2 3925.79,2617 3981.59,2672.8 4024.8,2672.8 C2.2 ; C2.2@4031,2673.09 C1.2 4031,2497.56 4050.09,2478.46 4063.39,2478.46 U1.3 4211.3,2475.16 4236.14,2500 P1.4
pads on no net: ESP1.1 ESP1.2 ESP1.10 ESP2.1 ESP2.2 ESP2.10 ESP3.1 ESP3.2 ESP3.10 p?.H U3.2 U3.3 U3.4 U3.29 U3.38 U3.39 U3.40 U3.41 U3.42 U3.43 U3.45 U3.46
copper on no net: | length 0.4
  Top Layer w10: 2755,2809.72 2755.28,2810

## Polygon pours and split planes (outlines as drawn)
GND on Top Layer "GND_L01_P012" (solid, pour order 12): 2625,2745 2860,2745 2860,2530 2710,2530 2710,2625 2695,2640 2625,2640
GND on Top Layer "GND_L01_P010" (solid, pour order 10): 2625,2620 2695,2620 2695,2525 2630,2525 2625,2530
vdd-3.3v on Top Layer "VDD-3.3V_L01_P000" (solid, remove dead copper, pour order 0): 4105,2335 4035,2335 3960,2260 3960,2255 3740,2255 3715,2280 3715,2485 3745,2515 3960,2515 4040,2435 4105,2435
GND on Bottom Layer "GND_L02_P011" (solid, pour order 11): 2565,2850 2945,2850 2945,2460 2925.45,2440.45 2715.47,2440.45 2715.47,2624.53 2700,2640 2540,2640 2540,2825
GND on Bottom Layer "GND_L02_P008" (solid, pour order 8): 2062,2917 2010,2865 2010,2445 2047,2408 2403,2408 2455,2460 2455,2870 2408,2917
GND on Bottom Layer "GND_L02_P009" (solid, pour order 9): 2625,2620 2695,2620 2695,2520 2635,2520 2625,2530

## Keep-outs
Keep-Out Layer:
  lines w10: 1075,995 4317,995 4319,997 4319,3151 3540,3151 1840,3151 1076,3151 1075,3150 1075,995

## Text inside footprints (layer, text, board x,y; h text height)
Ce1: Top Overlay "-" at 3638.96,2904.47 h39.37 r180
Ce2: Top Overlay "-" at 3671.04,2364.53 h39.37